# EAGLE board shield (EAGLE 8.5.2)
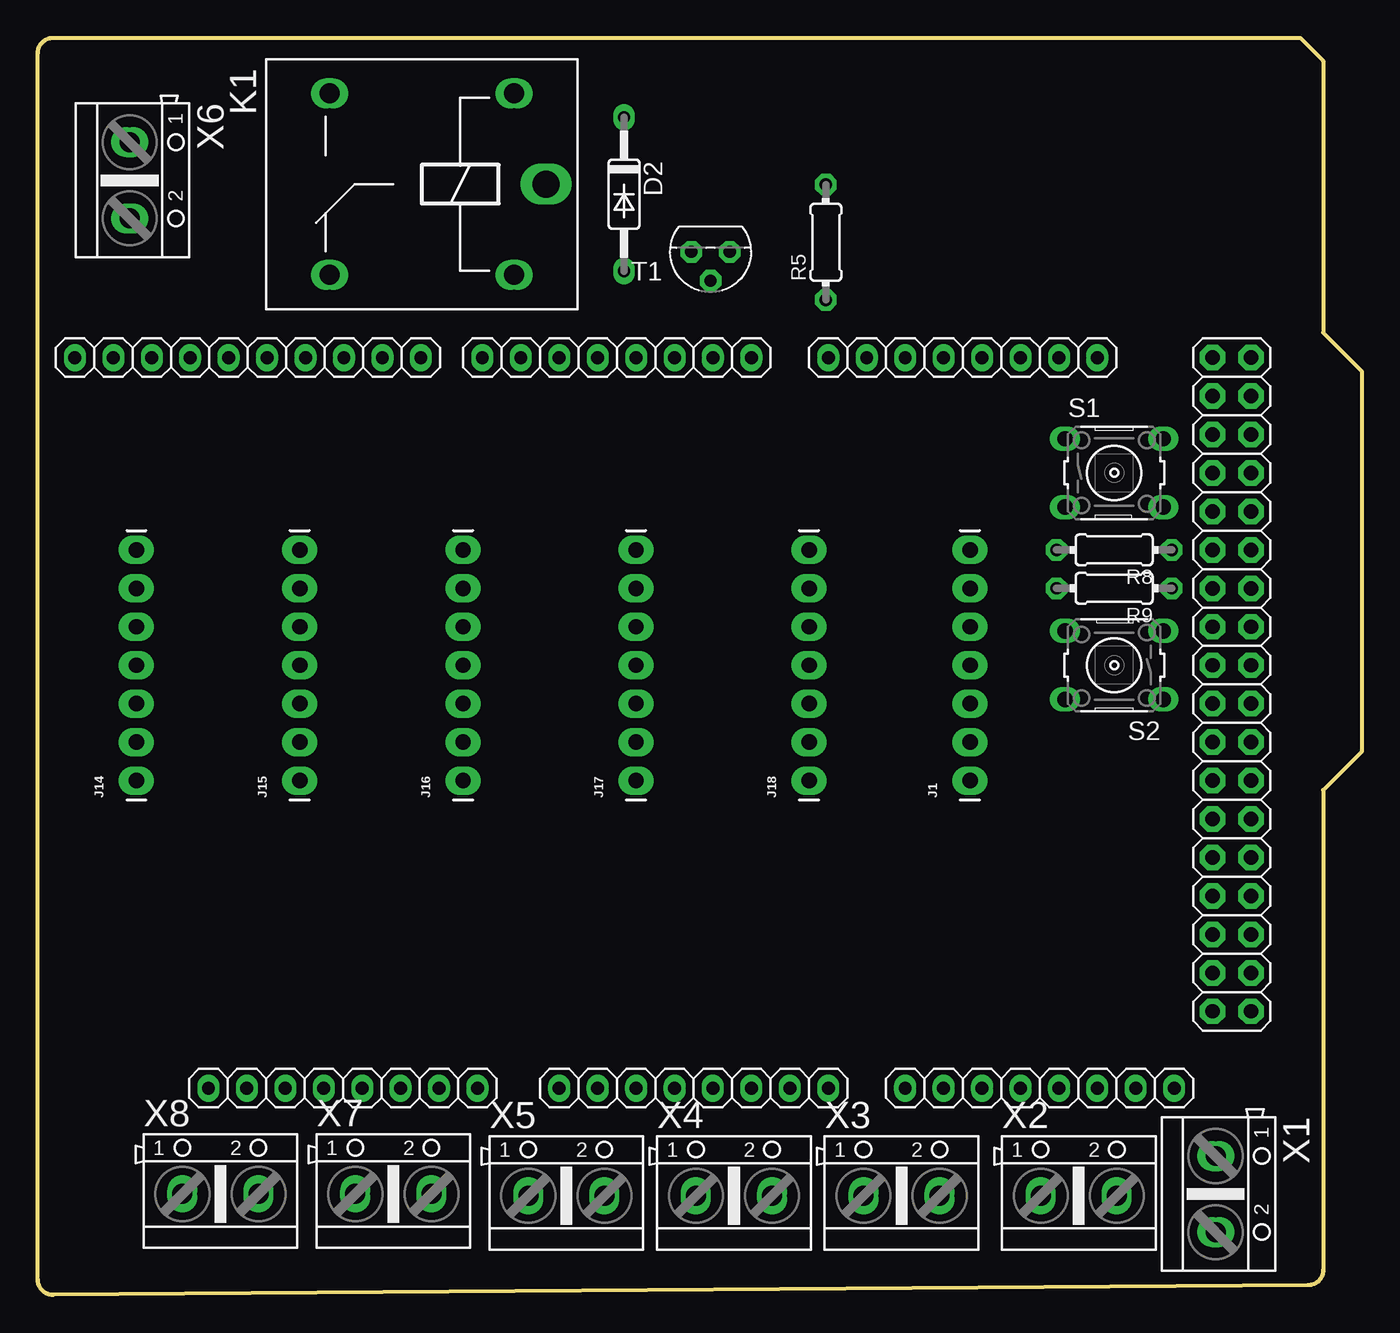
[diagram p0: board, top side]
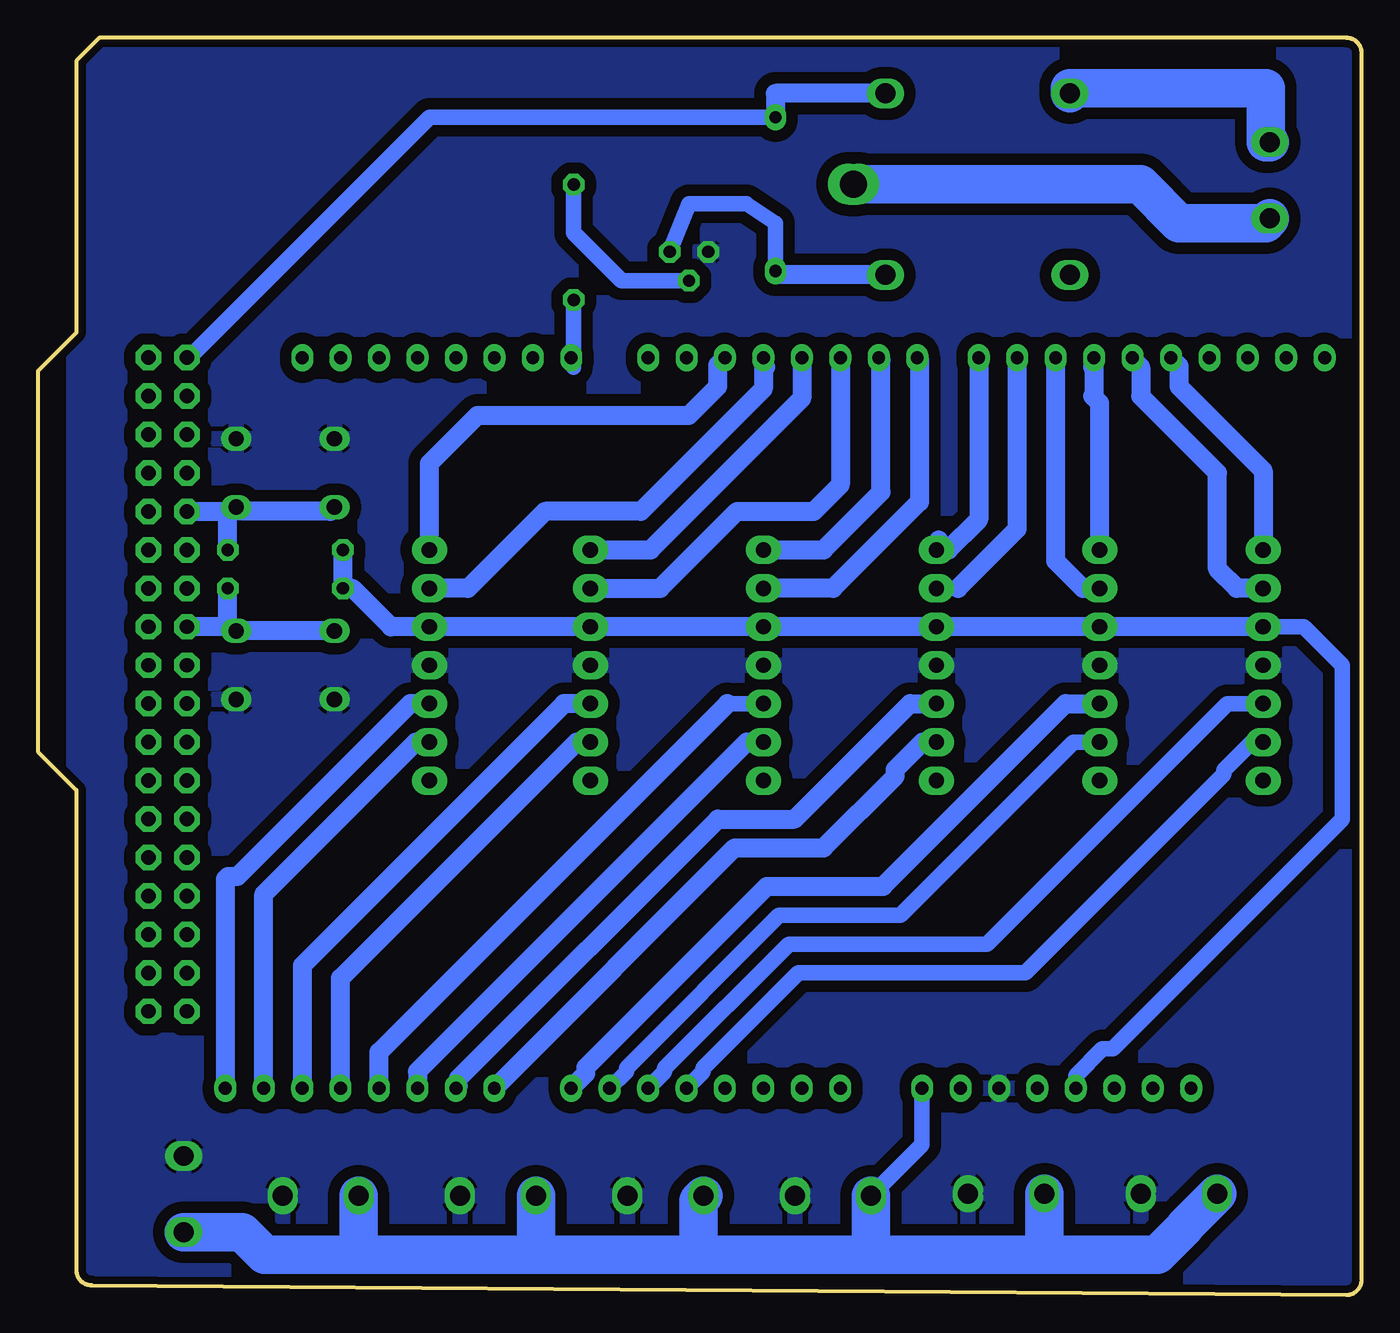
[diagram p1: board, bottom side, seen from below]

Size 87.47 x 83.03 mm. Coordinates in mm from the lower left corner, seen from the top.
Outline: 83.41,83.03 84.94,81.51 84.94,63.56 87.47,61.02 87.47,35.88 84.94,33.34 84.94,1.64 arc-90 83.94,0.64 1,0 arc-90 0,1 0,82.03 arc-90 1,83.03 83.41,83.03
Copper layers (1*16): Top 0.035mm / dielectric 1.6mm / Bottom 0.035mm
Design rules "default *": minimum track width 8mil, minimum drill 16mil, track to track 30mil, track to pad 25mil, pad to pad 8mil, via to via 8mil, smd to smd 6mil, copper to edge 20mil, drill to drill 12mil, minimum pad ring 12mil, minimum via ring 8mil, stop-mask expansion 2mil, vias tented up to drill 25mil, thermal gap 8mil
Net classes: 0 default: width 0.203 mm, drill 0.406 mm, clearance 0.203 mm; 1 USB: width 0.203 mm, drill 0.406 mm, clearance 0.203 mm; 2 gnd: width 0.203 mm, drill 0.406 mm, clearance 0.203 mm; 3 usbvcc: width 0.203 mm, drill 0.406 mm, clearance 0.203 mm; 4 USBpair: width 0.254 mm, drill 0.406 mm, clearance 0.61 mm

## Footprints (pad centres in the part's own frame; a part is rotated, then mirrored left to right if it is on the bottom)
1X08 = drill 0.85 pad 1.422 long: 1 -8.89,0; 2 -6.35,0; 3 -3.81,0; 4 -1.27,0; 5 1.27,0; 6 3.81,0; 7 6.35,0; 8 8.89,0
DO35-10 = drill 0.813 long: A 5.08,0; C -5.08,0
1X07_LONGPADS = drill 1.016 pad 1.88 long: 1 0,0; 2 2.54,0; 3 5.08,0; 4 7.62,0; 5 10.16,0; 6 12.7,0; 7 15.24,0
ZF112 = drill 1.321 long: 1 -6.096,5.994; 2 -6.096,-5.994; O 6.096,5.994; S 6.096,-5.994 | drill 1.803 long: P -8.204,0
1X10 = drill 0.85 pad 1.422 long: 1 -11.43,0; 2 -8.89,0; 3 -6.35,0; 4 -3.81,0; 5 -1.27,0; 6 1.27,0; 7 3.81,0; 8 6.35,0; 9 8.89,0; 10 11.43,0
0204/7 = drill 0.813 octagon: 1 -3.81,0; 2 3.81,0
B3F-10XX = drill 1.016 long: 1 -3.251,2.261; 2 3.251,2.261; 3 -3.251,-2.261; 4 3.251,-2.261
TO92 = drill 0.813 octagon: 1 1.27,0; 2 0,1.905; 3 -1.27,0
AK500/2 = drill 1.321 long: 1 -2.515,0; 2 2.515,0
2X18 = drill 0.95 pad 1.676 octagon: 1 -21.59,-1.27; 2 -21.59,1.27; 3 -19.05,-1.27; 4 -19.05,1.27; 5 -16.51,-1.27; 6 -16.51,1.27; 7 -13.97,-1.27; 8 -13.97,1.27; 9 -11.43,-1.27; 10 -11.43,1.27; 11 -8.89,-1.27; 12 -8.89,1.27; 13 -6.35,-1.27; 14 -6.35,1.27; 15 -3.81,-1.27; 16 -3.81,1.27; 17 -1.27,-1.27; 18 -1.27,1.27; 19 1.27,-1.27; 20 1.27,1.27; 21 3.81,-1.27; 22 3.81,1.27; 23 6.35,-1.27; 24 6.35,1.27; 25 8.89,-1.27; 26 8.89,1.27; 27 11.43,-1.27; 28 11.43,1.27; 29 13.97,-1.27; 30 13.97,1.27; 31 16.51,-1.27; 32 16.51,1.27; 33 19.05,-1.27; 34 19.05,1.27; 35 21.59,-1.27; 36 21.59,1.27

## Placement (x,y rotation side)
ADCH  8x1F-H8.5  [1X08]  66.2,13.65 0 top
ADCL  8x1F-H8.5  [1X08]  43.34,13.65 0 top
COMMUNICATION  8x1F-H8.5  [1X08]  61.12,61.91 180 top
D2  1N4446  [DO35-10]  38.73,72.7 270 top
J1  [1X07_LONGPADS]  61.59,33.97 90 top
J14  [1X07_LONGPADS]  6.51,33.97 90 top
J15  [1X07_LONGPADS]  17.3,33.97 90 top
J16  [1X07_LONGPADS]  28.1,33.97 90 top
J17  [1X07_LONGPADS]  39.53,33.97 90 top
J18  [1X07_LONGPADS]  50.96,33.97 90 top
K1  ZF112  [ZF112]  25.37,73.37 180 top
POWER  8x1F-H8.5  [1X08]  20.16,13.65 180 top
PWMH  10x1F-H8.5  [1X10]  13.88,61.91 180 top
PWML  8x1F-H8.5  [1X08]  38.26,61.91 180 top
R5  [0204/7]  52.07,69.53 90 top
R8  [0204/7]  71.12,49.21 180 top
R9  [0204/7]  71.12,46.67 180 top
S1  [B3F-10XX]  71.12,54.29 0 top
S2  [B3F-10XX]  71.12,41.59 180 top
T1  BC547  [TO92]  44.45,68.89 180 top
X1  [AK500/2]  77.83,6.66 270 top
X2  [AK500/2]  68.78,6.55 0 top
X3  [AK500/2]  57.07,6.55 0 top
X4  [AK500/2]  46,6.55 0 top
X5  [AK500/2]  34.92,6.55 0 top
X6  [AK500/2]  6.07,73.62 270 top
X7  [AK500/2]  23.5,6.67 0 top
X8  [AK500/2]  12.06,6.67 0 top
XIO  18x2F-H8.5  [2X18]  78.9,40.32 270 top

## Library data of the parts
ADCH ADCL COMMUNICATION POWER PWMH PWML XIO = SmartPrj
D2 = diode
J1 J14-J18 = SparkFun-Connectors
K1 = relay; OC_FARNELL: unknown; OC_NEWARK: unknown
R5 R8 R9 = rcl
S1 S2 = switch-omron; MPN: B3F-1000; OC_FARNELL: 176432; OC_NEWARK: 36M3542
T1 = transistor
X1-X8 = con-ptr500; OC_FARNELL: unknown; OC_NEWARK: unknown

## Nets
GND: J1.4 J14.4 J15.4 J16.4 J17.4 J18.4 POWER.3 S1.1 S1.2 S2.1 S2.2 T1.1 X1.1 X2.2 X3.2 X4.2 X5.2 X7.2 X8.2
N$1: J14.7 PWMH.6
N$3: K1.S X6.1
N$4: K1.P X6.2
N$7: J14.6 PWMH.5
N$9: J15.7 PWMH.4
N$10: J15.6 PWMH.3
N$11: ADCH.7 J1.2
N$12: POWER.1 X1.2 X2.1 X3.1 X4.1 X5.1 X7.1 X8.1
N$13: ADCH.8 J1.3
N$14: J17.6 PWML.8
N$15: COMMUNICATION.8 R5.1
N$16: J16.7 PWMH.1
N$17: J16.6 PWMH.2
N$18: J18.7 PWML.5
N$19: R5.2 T1.2
N$20: J17.7 PWML.7
N$21: J18.6 PWML.6
N$22: J1.7 PWML.3
N$23: J1.6 PWML.4
N$28: ADCL.6 J14.3
N$29: ADCL.5 J14.2
N$30: ADCH.6 J18.3
N$31: ADCH.5 J18.2
N$32: ADCH.4 J17.3
N$34: ADCH.3 J17.2
N$35: ADCH.2 J16.3
N$36: ADCH.1 J16.2
N$37: ADCL.8 J15.3
N$40: ADCL.7 J15.2
N$68: D2.A K1.1 T1.3
N$69: R8.1 S1.3 S1.4 XIO.9
N$74: R9.1 S2.3 S2.4 XIO.15
S$1: D2.C K1.2
VCC: J1.5 J14.5 J15.5 J16.5 J17.5 J18.5 POWER.5 R8.2 R9.2

## Tracks (layer width: path | path; a pad name or v marks a point on that pad's centre or on a via)
GND
  pour Bottom: 0,82.87 0,0.31 85.09,0.31 85.09,82.87
N$1
  Bottom 1.27: PWMH.6 12.06,61.37 12.06,60.01 6.51,54.45 J14.7
N$3
  Bottom 2.54: X6.1 6.35,76.13 6.35,79.69 19.28,79.69 K1.S
N$4
  Bottom 2.54: K1.P 14.63,73.37 12.06,70.8 6.35,70.8 6.07,71.08 X6.2
N$7
  Bottom 1.27: J14.6 8.26,46.67 9.53,47.94 9.53,54.29 14.61,59.37 14.61,61.28 15.15,61.82 PWMH.5
N$9
  Bottom 1.27: 17.78,61.28 17.69,61.37 PWMH.4 17.69,59.28 | J15.7 17.3,58.9 17.69,59.28 | 17.69,59.28 17.78,59.37
N$10
  Bottom 1.27: PWMH.3 20.23,48.48 18.41,46.67 J15.6
N$11
  Bottom 1.27: ADCH.7 72.55,26.47 62.51,36.51 J1.2
N$12
  Bottom 1.016: POWER.1 29.05,9.91 X5.1
  Bottom 2.54: X1.2 73.98,4.14 72.5,2.66 66.67,2.66 | X8.1 11.68,4.53 11.68,4.47 13.5,2.66 20.95,2.66 | 66.67,2.66 54.61,2.66 | 54.61,2.66 43.81,2.66 | 43.81,2.66 32.38,2.66 | 32.38,2.66 20.95,2.66 | X7.1 20.98,2.69 20.95,2.66 | X5.1 32.41,2.69 32.38,2.66 | 43.81,2.66 43.81,6.21 X4.1 | X3.1 54.56,2.71 54.61,2.66 | X2.1 66.27,3.07 66.67,2.66
N$13
  Bottom 1.27: J1.3 62.87,39.05 74.3,27.62 74.93,27.62 75.09,27.46 ADCH.8
N$14
  Bottom 1.27: PWML.8 29.21,61.75 29.21,52.39 34.92,46.67 J17.6
N$15
  Bottom 1.016: R5.1 52.07,61.75 | 52.07,61.28 52.07,61.75 | 52.07,61.75 COMMUNICATION.8
N$16
  Bottom 1.27: 27.94,49.85 27.94,49.37 J16.7 27.3,49.21 25.4,51.12 25.31,51.21 PWMH.1
N$17
  Bottom 1.016: 26.67,46.67 J16.6
  Bottom 1.27: PWMH.2 22.77,50.57 26.67,46.67
N$18
  Bottom 1.27: PWML.5 36.99,59.21 46.99,49.21 J18.7
N$19
  Bottom 1.016: T1.2 48.9,66.99 52.07,70.17 R5.2
N$20
  Bottom 1.27: J17.7 35.56,49.21 31.75,53.02 31.75,61.75 PWML.7
N$21
  Bottom 1.27: PWML.6 34.45,53.5 36.2,51.75 41.27,51.75 46.35,46.67 J18.6
N$22
  Bottom 1.27: J1.7 61.59,54.93 58.42,58.1 44.45,58.1 42.55,60.01 42.55,61.44 PWML.3
N$23
  Bottom 1.27: 39.37,61.28 39.53,61.44 PWML.4 39.53,59.85 47.62,51.75 53.98,51.75 59.05,46.67 J1.6
N$28
  Bottom 1.016: ADCL.6 46.05,14.75 46.05,14.98 37.85,23.18 24.77,23.18 8.89,39.05 J14.3
N$29
  Bottom 1.016: ADCL.5 43.51,14.75 43.51,14.98 37.22,21.27 22.23,21.27 9.1,34.39 9.1,34.65 7.25,36.51 J14.2
N$30
  Bottom 1.27: J18.3 52.7,39.05 70.01,21.75 ADCH.6
N$31
  Bottom 1.27: ADCH.5 67.47,20.91 51.87,36.51 J18.2
N$32
  Bottom 1.016: J17.3 41.91,39.05
  Bottom 1.27: ADCH.4 64.93,16.03 41.91,39.05
N$34
  Bottom 1.27: J17.2 40.64,36.51 62.39,14.76 ADCH.3
N$35
  Bottom 1.27: ADCH.2 59.69,13.81 59.69,14.29 42.55,31.43 37.47,31.43 29.84,39.05 J16.3
N$36
  Bottom 1.27: ADCH.1 41.44,29.52 35.56,29.52 30.82,34.27 30.82,34.71 29.01,36.51 J16.2
N$37
  Bottom 1.27: ADCL.8 51.26,14.62 51.26,15.03 39.3,26.98 31.63,26.98 19.57,39.05 J15.3
N$40
  Bottom 1.016: ADCL.7 48.59,14.75 48.59,14.98 38.49,25.08 30.48,25.08 19.05,36.51 J15.2
N$68
  Bottom 1.016: D2.A 38.73,70.8 40.64,72.07 44.45,72.07 T1.3
  Bottom 1.27: 31.75,67.37 K1.1 38.73,67.37 D2.A
N$69
  Bottom 1.27: S1.3 68.15,51.75 74.65,51.75 | 74.65,51.75 74.93,51.75 XIO.9 | 74.65,51.75 S1.4 | R8.1 74.93,51.47 74.65,51.75
N$74
  Bottom 1.27: S2.3 74.93,44.41 R9.1 | S2.3 74.65,44.13 XIO.15 | S2.4 S2.3
S$1
  Bottom 1.016: 52.07,77.78 D2.C 61.59,77.78 77.47,61.91
  Bottom 1.27: D2.C 38.73,79.36 K1.2
VCC
  Bottom 1.016: 64.19,44.18 64.14,44.13 | J14.5 3.81,44.13 1.27,41.59 1.27,31.43 16.45,16.25 17.13,16.25 18.89,14.49 POWER.5
  Bottom 1.27: R8.2 R9.2 66.67,46.67 64.14,44.13 J1.5 J18.5 J17.5 J16.5 J15.5 J14.5